# Altium PCB devrepcb.PcbDoc
Units mm, origin at the board's own origin, x right, y up, seen from the top; angles counter-clockwise.
Board outline 100 x 100 mm, 2 copper layers (Top Layer, Bottom Layer); 13 components, 18 nets, 65 pads, 0 vias.
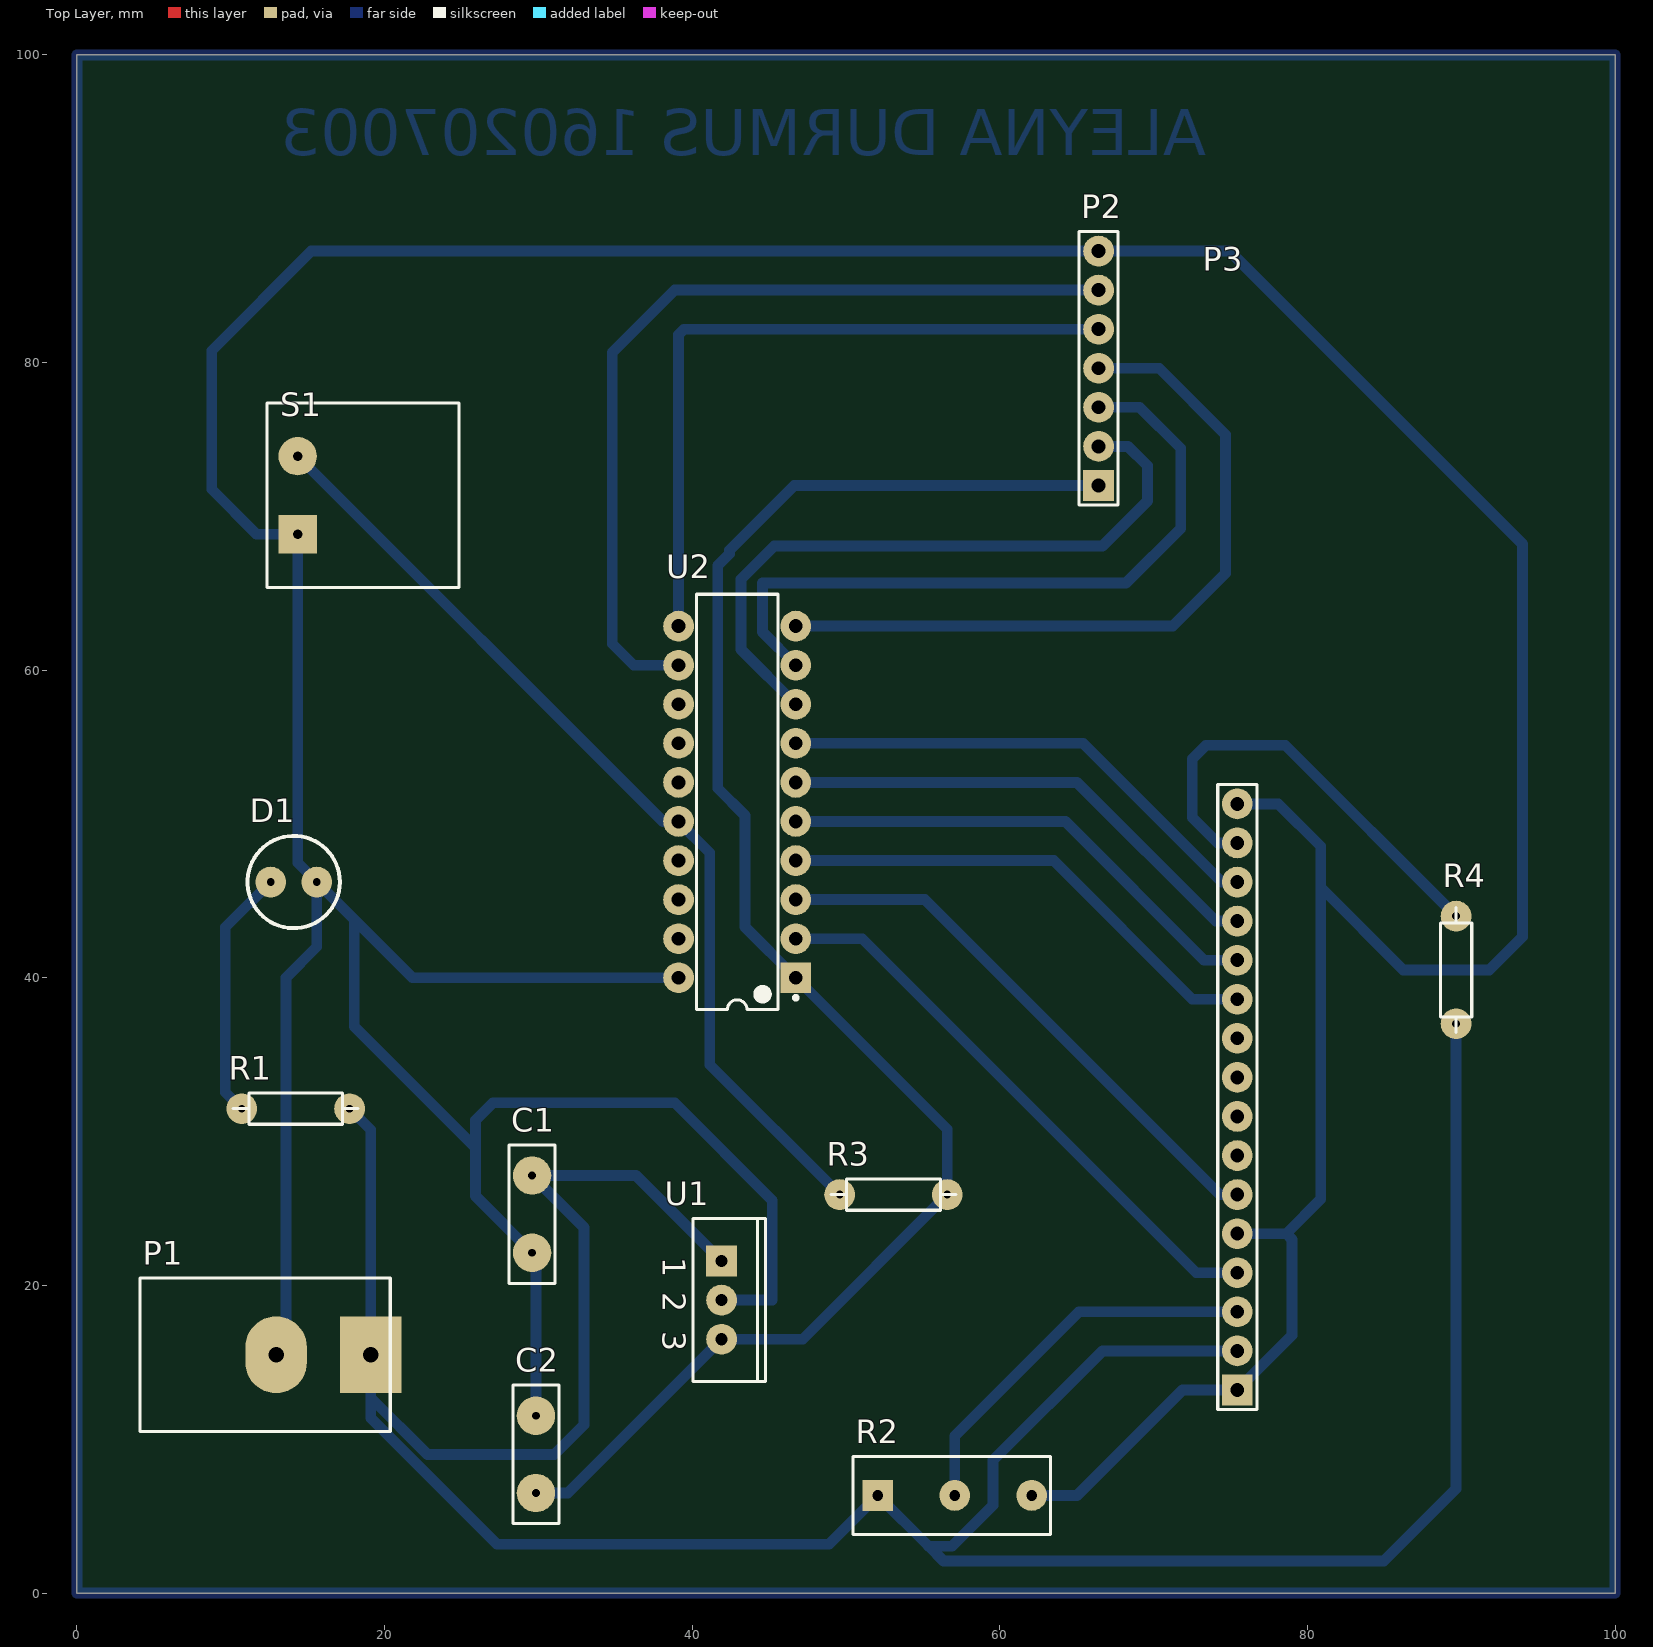
[diagram p0: Top Layer view]
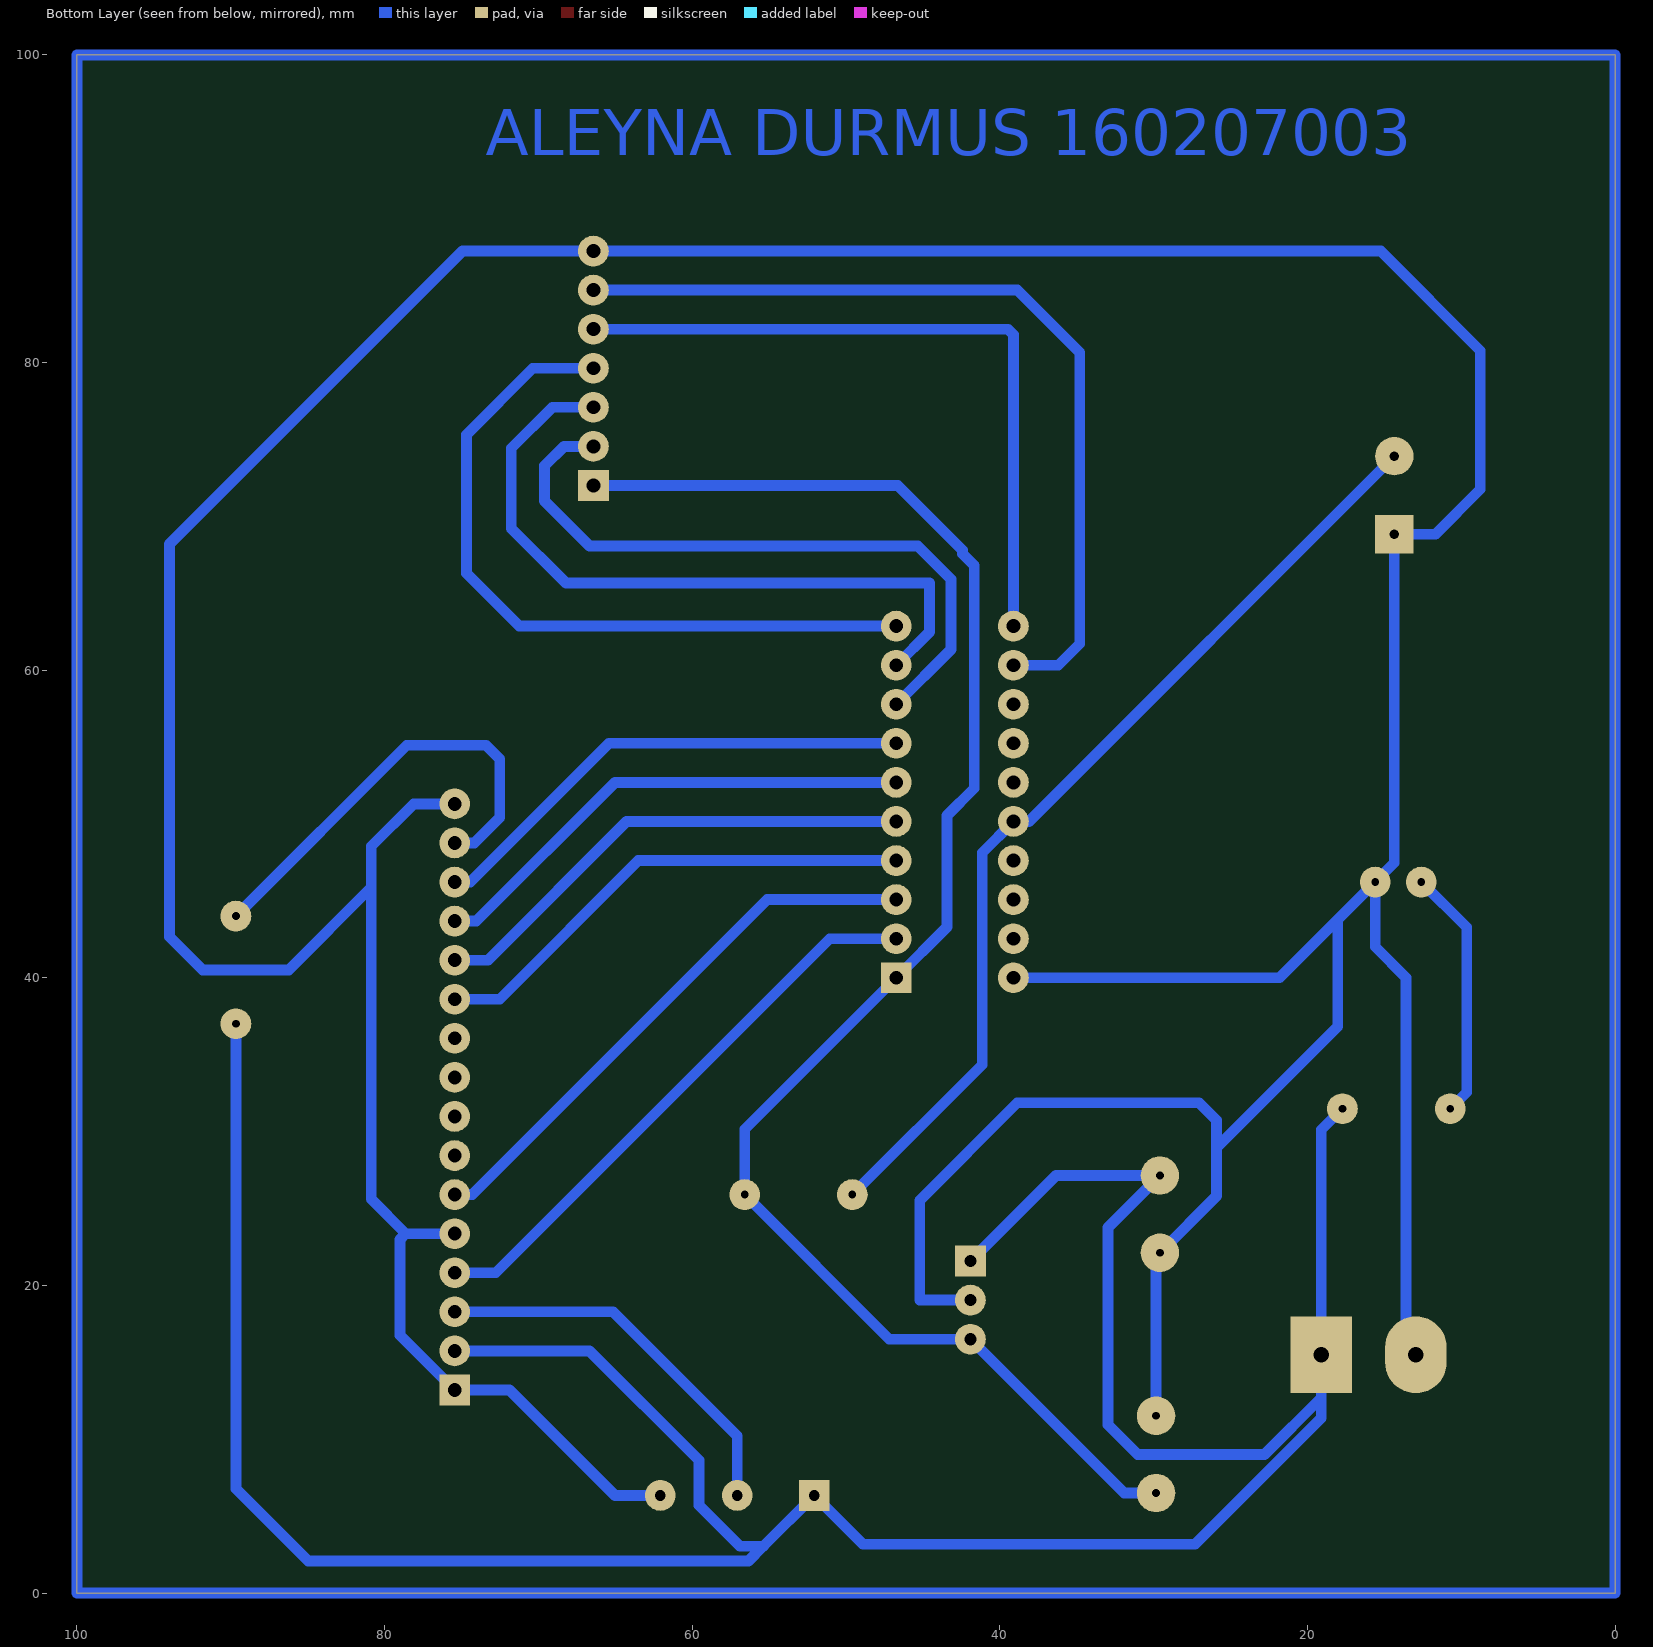
[diagram p1: Bottom Layer view, seen from below]
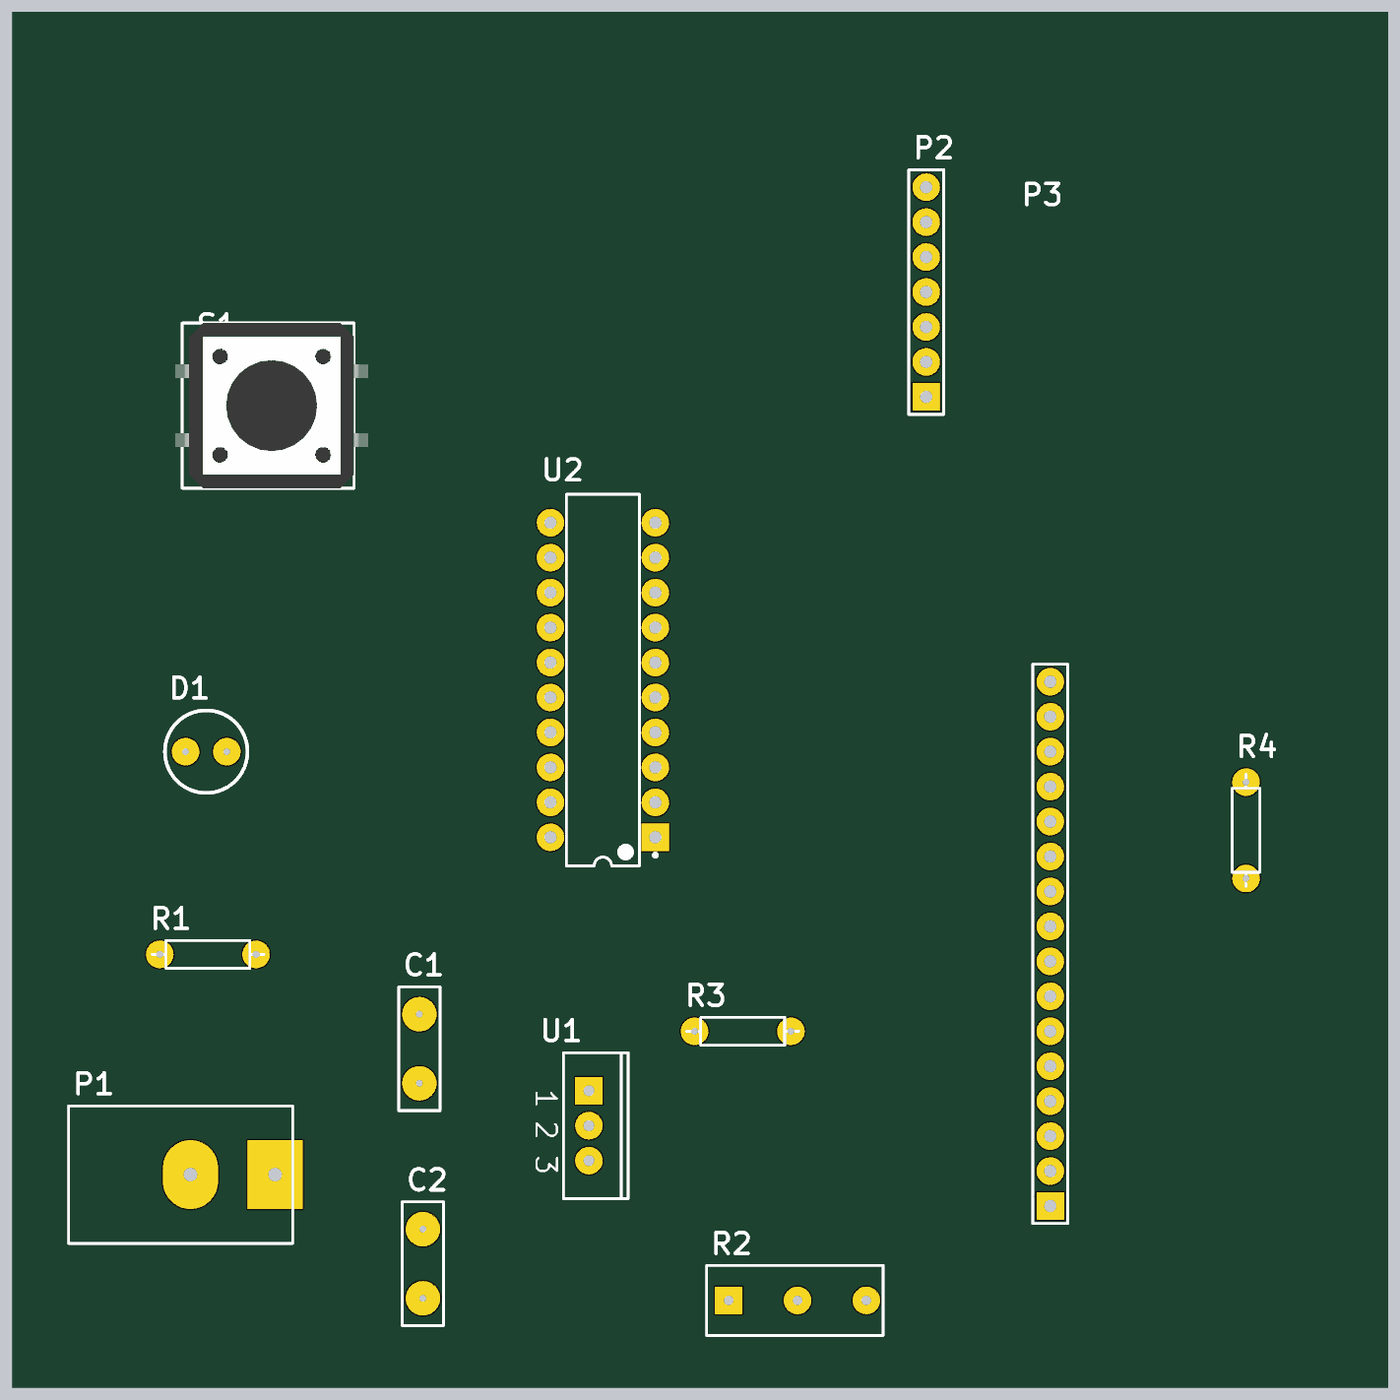
[diagram p2: 3D render of the assembled board from above, using the file's embedded part models]

## Layer stack, top to bottom
Top Solder: solder mask 0.0102, Solder Resist, Dk 3.5
Top Layer: signal copper 0.0356
Dielectric 1: dielectric 0.32, FR-4, Dk 4.8
Bottom Layer: signal copper 0.0356
Bottom Solder: solder mask 0.0102, Solder Resist, Dk 3.5

## Board outline
0,0 0,100 100,100 100,0

## Design rules (kind name [scope] priority, off if disabled: settings)
Clearance [All] p1: gap=0.254 ignorepadtopadclearanceinfootprint=FALSE except(0: Arc-Hole Track-Hole SMDPad-Hole THPad-Hole Via-Hole Fill-Hole Poly-Hole Region-Hole Text-Hole)
PolygonConnect [All] p1: connectstyle=Relief reliefconductorwidth=0.254 reliefentries=4 polygonreliefangle="90 Angle" airgapwidth=0.254
RoutingVias [All] p1: holewidth=0.711 width=1.27 viastyle="Through Hole" minholewidth=0.711 minwidth=1.27 maxholewidth=0.711 maxwidth=1.27
SolderMaskExpansion [All] p1: expansion=0.102
Width [All] p1: maxlimit=1 minlimit=0.5 preferedwidth=0.7
30 further rules are at their usual default settings.

## Components (designator, comment, footprint, x,y, rotation, side; value= is the part's Value field where it differs from the comment)
C1 "Cap" RAD-0.3__ 29.591,24.638 r90 top value=0.33uf
C2 "Cap" RAD-0.3__ 29.845,9.017 r270 top value=0.1uf
D1 "LED0" LED-0__ 14.097,46.228 r180 top
P1 "Header 2" HDR1X2__ 19.104,15.494 r180 top
P2 "Header 7" HDR1X7 66.421,72.009 r90 top
P3 "Header 16" HDR1X16__ 75.438,13.208 r90 top
R1 "Res2" AXIAL-0.4 14.224,31.496 r0 top value=330OHM
R2 "RPot" VR5 57.07,6.35 r180 top value=1K
R3 "Res2" AXIAL-0.4 53.086,25.908 r180 top value=56K
R4 "Res2" AXIAL-0.4 89.662,40.513 r270 top value=330ohm
S1 "SW-PB" SPST-2__ 14.351,71.374 r90 top
U1 "LF33CV" TO-220A 41.91,19.05 r270 top
U2 "MSP430G2553IN20" TI-N20 42.926,51.435 r180 top

## Footprints (in the part's own frame and the unit in brackets; to place one, negate y for a bottom-side part, rotate by r counter-clockwise, add the part's x,y. Pads: shape width x height; smd on the part's side, far side on the other; paste and mask are expansions set on the pad)
AXIAL-0.4 [mm] "Axial Device, Thru-Hole; 2 Leads; 0.4 in Pin Spacing"
  round 2 hole 0.5: 1(-3.5,0) 2(3.5,0)
  silkscreen extent -4.06,-1.02 4.06,1.02, body extent -4,-1.11 4,1.11, height 1.11
HDR1X2__ [mm] "Connector; Header; 2 Position"
  rect 4x5 hole 1: 1(0,0)
  oval 4x5 hole 1: 2(6.15,0)
  silkscreen extent -1.27,-5 15,5, body extent -0.7,-4.4 13.5,5.4, height 12
HDR1X7 [mm] "Connector; Header; 7 Position"
  rect 2x2 hole 0.9: 1(0,0)
  round 2 hole 0.9: 2(2.54,0) 3(5.08,0) 4(7.62,0) 5(10.16,0) 6(12.7,0) 7(15.24,0)
  silkscreen extent -1.27,-1.27 16.51,1.27
HDR1X16__ [mm] "Connector; Header; 16 Position"
  rect 2x2 hole 0.9: 1(0,0)
  round 2 hole 0.9: 2(2.54,0) 3(5.08,0) 4(7.62,0) 5(10.16,0) 6(12.7,0) 7(15.24,0) 8(17.78,0) 9(20.32,0) 10(22.86,0) 11(25.4,0) 12(27.94,0) 13(30.48,0) 14(33.02,0) 15(35.56,0) 16(38.1,0)
  silkscreen extent -1.27,-1.27 39.37,1.27, body extent -8,-33.5 72,2.5, height 14
LED-0__ [mm] "LED; 2 Leads"
  round 2 hole 0.5: 1(1.5,0) 2(-1.5,0)
  silkscreen extent -3,-3 3,3, body extent -3,-3 3,3, height 10
RAD-0.3__ [mm] "Radial Cap, Thru-Hole; 2 Leads; 0.3 in Pin Spacing"
  round 2.5 hole 0.5: 1(-2.51,0) 2(2.51,0)
  silkscreen extent -4.5,-1.5 4.5,1.5, body extent -3.55,-1.15 3.55,1.15, height 8.05
SPST-2__ [mm] "Switch; 2 Leads"
  rect 2.5x2.5 hole 0.6: 1(-2.54,0)
  round 2.5 hole 0.6: 2(2.54,0)
  silkscreen extent -6,-10.5 6,2, body extent -6,-11.52 6,2.52, height 9
TI-N20 [mm] "DIP, 20-Leads, Body 25.4x6.35 mm, Pitch 2.54 mm"
  rect 2x2 hole 0.9: 1(-3.81,11.43)
  round 2 hole 0.9: 2(-3.81,8.89) 3(-3.81,6.35) 4(-3.81,3.81) 5(-3.81,1.27) 6(-3.81,-1.27) 7(-3.81,-3.81) 8(-3.81,-6.35) 9(-3.81,-8.89) 10(-3.81,-11.43) 11(3.81,-11.43) 12(3.81,-8.89) 13(3.81,-6.35) 14(3.81,-3.81) 15(3.81,-1.27) 16(3.81,1.27) 17(3.81,3.81) 18(3.81,6.35) 19(3.81,8.89) 20(3.81,11.43)
  silkscreen extent -3.94,-13.5 2.65,13.5, body extent -3.95,-13.45 3.95,13.45, height 5.08
TO-220A [mm] "TO, Thru-Hole, Vertical, Heatsink Mounted; 3 In-Line Leads; Pitch 2.54 mm"
  rect 2x2 hole 0.8: 1(-2.54,0)
  round 2 hole 0.8: 2(0,0) 3(2.54,0)
  silkscreen extent -5.3,-1.85 5.3,2.85, body extent -5,-2.01 5,2, height 21
VR5 [mm] "Thru-Hole; 3 Leads"
  rect 2x2 hole 0.7: 1(5,0)
  round 2 hole 0.7: 2(-5,0) 3(0,0)
  silkscreen extent -6.22,-2.54 6.6,2.54

## Part data
C1 C2: "Capacitor", LatestRevisionDate=17-Jul-2002, LatestRevisionNote="Re-released for DXP Platform.", PackageDescription="Radial Cap, Thru-Hole; 2 Leads; 0.3 in Pin Spacing", PackageReference=RAD-0.3, Published=8-Jun-2000, Publisher="Altium Limited"
D1: "Typical INFRARED GaAs LED", LatestRevisionDate=08-Jul-2005, LatestRevisionNote="Mech Layer 1 removed.", PackageDescription="LED; 2 Leads", PackageReference=LED-0, Published=8-Jun-2000, Publisher="Altium Limited"
P1: "Header, 2-Pin", LatestRevisionDate=17-Jul-2002, LatestRevisionNote="Re-released for DXP Platform.", Publisher="Altium Limited"
P2: "Header, 7-Pin", LatestRevisionDate=17-Jul-2002, LatestRevisionNote="Re-released for DXP Platform.", Publisher="Altium Limited"
P3: "Header, 16-Pin", LatestRevisionDate=17-Jul-2002, LatestRevisionNote="Re-released for DXP Platform.", Publisher="Altium Limited"
R1 R3 R4: "Resistor", LatestRevisionDate=17-Jul-2002, LatestRevisionNote="Re-released for DXP Platform.", PackageDescription="Axial Device, Thru-Hole; 2 Leads; 0.4 in Pin Spacing", PackageReference=AXIAL-0.4, Published=8-Jun-2000, Publisher="Altium Limited"
R2: "Potentiometer", LatestRevisionDate=17-Jul-2002, LatestRevisionNote="Re-released for DXP Platform.", PackageDescription="Variable Resistor, Thru-Hole; 3 Leads", PackageReference=VR5, Published=8-Jun-2000, Publisher="Altium Limited", Set Position=0.5, Sim Note="Enter the Resistance value and the set point into parameter fields."
S1: "Switch", LatestRevisionDate=17-Jul-2002, LatestRevisionNote="Re-released for DXP Platform.", PackageDescription="Switch; 2 Leads", PackageReference=SPST-2, Published=24-Mar-1999, Publisher="Altium Limited"
U1: "500mA, Very Low Drop (0.45V) Voltage Regulator", ComponentLink1Description="Manufacturer Link", ComponentLink1URL=http://www.st.com/, ComponentLink2Description=Datasheet, ComponentLink2URL=http://www.st.com/stonline/books/pdf/docs/2574.pdf, DatasheetVersion=Feb-2004, LatestRevisionDate=06-Jun-2005, LatestRevisionNote="PCB Pin sequence re-ordered.", PackageDescription="TO, Thru-Hole, Vertical, Heatsink Mounted; 3 In-Line Leads; Pitch 2.54 mm", PackageReference=TO-220A, PackageVersion=Jul-2004, Published=24-Aug-2001, Publisher="Altium Limited"
U2: "16 MHz Mixed Signal Microcontroller with 16 KB Flash, 512 B SRAM and 24 GPIOs, -40 to 85 degC, 20-pin DIP (N), Pb-Free (RoHS)", Frequency(MHz)=16, Manufacturer="Texas Instruments", Supplier Part Number 1=MSP430G2533IRHB32T-ND, Temp Sensor=Yes, ADC="10-bit SAR", ADC Channels=8, Brown Out Reset=Yes, Cap touch I/O=Yes, Code_JEDEC=MS-001, Comparators=Yes, ComponentLink1Description="Manufacturer URL", ComponentLink1URL=http://www.ti.com/, ComponentLink2Description=Datasheet, ComponentLink2URL=http://www.ti.com/general/docs/lit/getliterature.tsp?genericPartNumber=MSP430G2553&fileType=pdf, ComponentLink3Description="Package Specification", ComponentLink3URL=http://www.ti.com/litv/pdf/mpds177g, DatasheetVersion=SLAS735G, Eco-Plan="Pb-Free (RoHS)", Flash(KB)=16, GPIO=24, Mounting Technology="Through Hole", PackageDescription="20-Pin Plastic In-Line, Body 25.40 x 6.35 mm, Pitch 2.54 mm", PackageReference=N20, PackageVersion=4040049/E, PartNumber=MSP430G2553IN20, SRAM(B)=512, SubFamily="Value Line", Supplier 1=Digi-Key, Supplier 2=Mouser, Supplier Part Number 2=595-P430G2533IRHB32T, Timers - 16-bit=2, USCI_A (UART/LIN/IrDA/SPI)=1, USCI_B (I2C & SPI)=1, Watchdog=Yes

## Nets (pads, with @x,y where several pads share a name; then routed paths per layer and width w, separated by ;. In a path a pad name is that pad's centre, name@x,y a point inside that pad or via, vN(x,y) a via of type N, cw(c..) or ccw(c..) an arc to the next point about the centre after c; other vN are vias at no path point)
GND: C1.1 C2.1 D1.2 P1.2 P2.7 P3.1 P3.5 P3.16 R2.2 S1.1 U1.2 U2.20 | length 369.4
  Bottom Layer w0.7: P1.2 13.589,16.129 13.589,40.005 15.597,42.013 D1.2 ; C2.1 29.845,21.874 C1.1 25.908,25.811 25.908,28.956 ; U2.20 21.82,40.005 18.034,43.791 ; U1.2 45.212,19.05 45.212,25.527 38.862,31.877 27.051,31.877 25.908,30.734 25.908,28.956 ; R2.2 65.024,6.35 71.882,13.208 P3.1 78.994,16.764 78.994,22.987 78.613,23.368 ; P3.5 78.613,23.368 ; P3.16 78.105,51.308 80.86,48.553 80.86,45.886 ; D1.2 18.034,43.791 ; D1.2 14.351,47.474 S1.1 11.684,68.834 8.763,71.755 8.763,80.772 15.24,87.249 P2.7 74.93,87.249 93.98,68.199 93.98,42.672 91.821,40.513 86.233,40.513 80.86,45.886 ; 18.034,43.791 18.034,36.83 25.908,28.956 ; 78.613,23.368 80.86,25.615 80.86,45.886
NetC1_2: C1.2 P1.1 P3.2 R1.2 R2.1 R4.2 U1.1 | length 205.4
  Bottom Layer w0.7: R1.2 19.104,30.116 P1.1 19.104,12.7 ; U1.1 36.352,27.148 C1.2 32.969,23.77 32.969,10.947 31.039,9.017 22.787,9.017 19.104,12.7 ; P3.2 66.675,15.748 59.563,8.636 59.563,5.715 56.896,3.048 55.372,3.048 ; R4.2 89.662,6.782 84.963,2.083 56.337,2.083 55.372,3.048 ; 19.104,12.7 19.104,11.379 27.308,3.175 48.895,3.175 R2.1 55.372,3.048
NetC2_2: C2.2 P2.1 R3.1 U1.3 U2.1 | length 108.9
  Bottom Layer w0.7: C2.2 31.907,6.507 U1.3 47.188,16.51 R3.1 56.586,30.155 U2.1 43.434,43.307 43.434,50.546 41.656,52.324 41.656,66.802 42.418,67.564 42.418,67.793 46.634,72.009 P2.1
NetD1_1: D1.1 R1.1 | length 16.4
  Bottom Layer w0.7: R1.1 9.652,32.568 9.652,43.283 D1.1
NetP2_2: P2.2 U2.8 | length 44.1
  Bottom Layer w0.7: U2.8 43.18,61.341 43.18,65.913 45.339,68.072 66.672,68.072 69.596,70.996 69.596,73.283 68.33,74.549 P2.2
NetP2_3: P2.3 U2.9 | length 46.5
  Bottom Layer w0.7: U2.9 44.577,62.484 44.577,65.659 68.199,65.659 71.755,69.215 71.755,74.422 69.088,77.089 P2.3
NetP2_4: P2.4 U2.10 | length 48.4
  Bottom Layer w0.7: U2.10 71.247,62.865 74.676,66.294 74.676,75.311 70.358,79.629 P2.4
NetP2_5: P2.5 U2.11 | length 46.4
  Bottom Layer w0.7: U2.11 39.116,81.813 39.472,82.169 P2.5
NetP2_6: P2.6 U2.12 | length 57.1
  Bottom Layer w0.7: U2.12 36.195,60.325 34.798,61.722 34.798,80.645 38.862,84.709 P2.6
NetP3_3: P3.3 R2.3 | length 25.6
  Bottom Layer w0.7: R2.3 57.07,10.207 65.151,18.288 P3.3
NetP3_4: P3.4 U2.2 | length 37.7
  Bottom Layer w0.7: U2.2 51.054,42.545 72.771,20.828 P3.4
NetP3_6: P3.6 U2.3 | length 36.6
  Bottom Layer w0.7: U2.3 55.118,45.085 74.295,25.908 P3.6
NetP3_11: P3.11 U2.4 | length 32.4
  Bottom Layer w0.7: U2.4 63.5,47.625 72.517,38.608 P3.11
NetP3_12: P3.12 U2.5 | length 32.4
  Bottom Layer w0.7: U2.5 64.262,50.165 73.279,41.148 P3.12
NetP3_13: P3.13 U2.6 | length 32.4
  Bottom Layer w0.7: U2.6 65.024,52.705 74.041,43.688 P3.13
NetP3_14: P3.14 U2.7 | length 32.4
  Bottom Layer w0.7: U2.7 65.405,55.245 74.422,46.228 P3.14
NetP3_15: P3.15 R4.1 | length 29.5
  Bottom Layer w0.7: P3.15 74.168,48.768 72.517,50.419 72.517,54.229 73.406,55.118 78.557,55.118 R4.1
NetR3_2: R3.2 S1.2 U2.16 | length 63.2
  Bottom Layer w0.7: S1.2 38.1,50.165 U2.16 41.148,48.133 41.148,34.346 R3.2
pads on no net: P3.7 P3.8 P3.9 P3.10 U2.13 U2.14 U2.15 U2.17 U2.18 U2.19
copper on no net: | length 400
  Bottom Layer w0.7: 0,0 0,100 100,100 100,0 0,0

## Other copper
Bottom Layer:
  text "ALEYNA DURMUS 160207003" at 73.406,93.472 h3

## Text inside footprints (layer, text, board x,y; h text height)
U1: Top Overlay "1" at 38.085,21.84 h1.5 r270; Top Overlay "2" at 38.085,19.55 h1.5 r270; Top Overlay "3" at 38.085,17.01 h1.5 r270